# Altium PCB LazeRX-Mini 1.5.PcbDoc
Units mm, origin at the board's own origin, x right, y up, seen from the top; angles counter-clockwise.
Board outline 19.5 x 27 mm, 2 copper layers (Top Layer, Bottom Layer); 26 components, 38 nets, 111 pads, 48 vias.
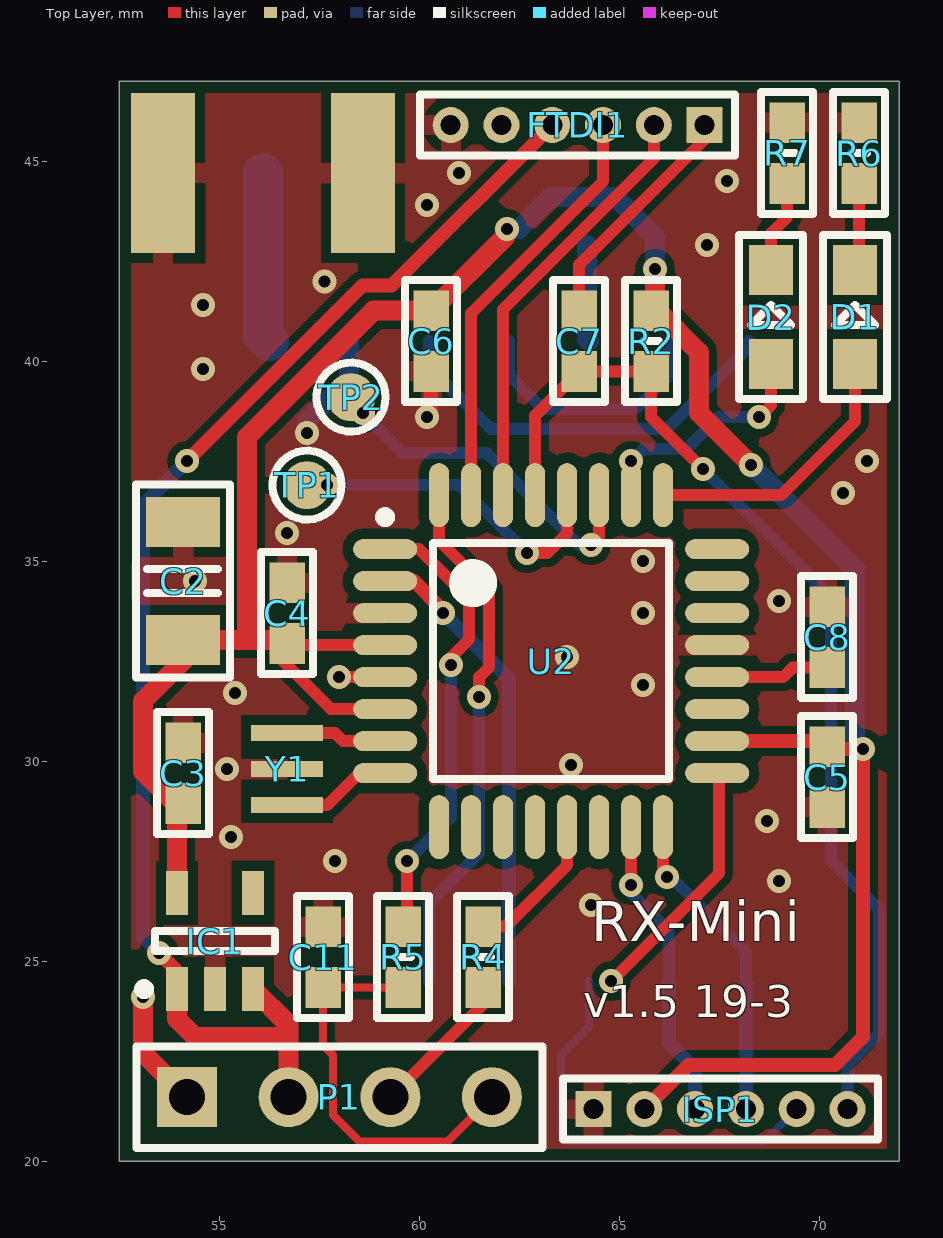
[diagram p0: Top Layer view]
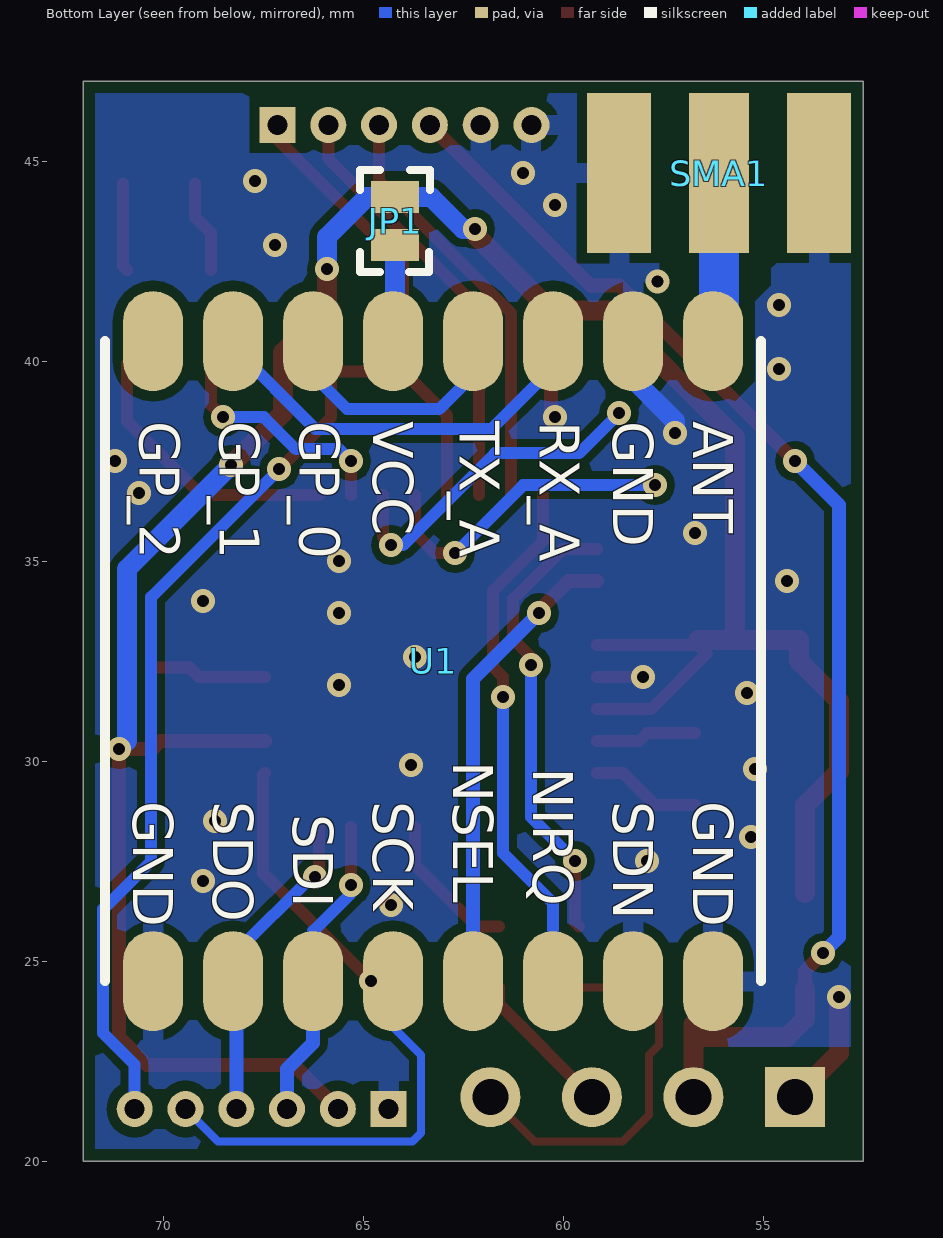
[diagram p1: Bottom Layer view, seen from below]

## Layer stack, top to bottom
Top Solder: solder mask 0.0102, Solder Resist, Dk 3.5
Top Layer: signal copper 0.0356
Dielectric 1: dielectric 0.32, FR-4, Dk 4.8
Bottom Layer: signal copper 0.0356
Bottom Solder: solder mask 0.0102, Solder Resist, Dk 3.5

## Board outline
52.5,20 72,20 72,47 52.5,47

## Design rules (kind name [scope] priority, off if disabled: settings)
BoardOutlineClearance BoardOutlineClearance_1 [OnLayer('Top Overlay')] p1: gap=0
BoardOutlineClearance [All] p2: gap=0.3
Clearance [All] p1: gap=0.2 except(0.26: Arc-SMDPad Arc-THPad Arc-Fill Track-SMDPad Track-THPad Track-Fill SMDPad-SMDPad SMDPad-THPad SMDPad-Via SMDPad-Fill SMDPad-Poly SMDPad-Region SMDPad-Text THPad-THPad THPad-Via THPad-Fill THPad-Poly THPad-Region THPad-Text Via-Fill Fill-Fill)
ComponentClearance [All] p1: gap=0.25 collisioncheckmode=3 verticalgap=0 showdistances=FALSE
HoleSize [All] p1: absolutevalues=TRUE maxlimit=6 minlimit=0.3 maxpercent=80.000 minpercent=20.000
HoleToHoleClearance [All] p1: gap=0.2 allowstackedmicrovias=TRUE
MinimumSolderMaskSliver [All] p1: minsoldermaskwidth=0
PolygonConnect PolygonConnect_1 [isVia vs InNet('Gnd')] p1: connectstyle=Direct reliefconductorwidth=0.254 reliefentries=4 polygonreliefangle="90 Angle" airgapwidth=0.254
PolygonConnect [All] p2: connectstyle=Relief reliefconductorwidth=0.5 reliefentries=4 polygonreliefangle="90 Angle" airgapwidth=0.254
RoomDefinition "LazeRX-Mini 1.5" [InComponentClass('LazeRX-Mini 1.5')] p1: confinementstyle=ConfineOut formatcopy=TRUE lockcomponents=FALSE outline 128.016,22.86 266.827,22.86 266.827,99.441 128.016,99.441
RoutingVias [All] p1: holewidth=0.3 width=0.6 viastyle="Through Hole" minholewidth=0.3 minwidth=0.6 maxholewidth=3 maxwidth=3
SilkToSilkClearance [All] p1: silktosilkclearance=0
SilkToSolderMaskClearance [IsPad] p1: minsilkscreentomaskgap=0 clearancetoexposedcopper=TRUE
SolderMaskExpansion [All] p1: expansion=0.102
Width [All] p1: maxlimit=3 minlimit=0.2 preferedwidth=0.35
24 further rules are at their usual default settings.

## Components (designator, comment, footprint, x,y, rotation, side; value= is the part's Value field where it differs from the comment)
C2 "10uF" "1206 CAP" 54.1,34.5 r90 top
C3 "104" "0603 CAP" 54.1,29.7 r270 top
C4 "104" "0603 CAP" 56.7,33.7 r270 top
C5 "104" "0603 CAP" 70.2,29.6 r90 top
C6 "104" "0603 CAP" 60.3,40.5 r90 top
C7 "104" "0603 CAP" 64,40.5 r270 top
C8 "104" "0603 CAP" 70.2,33.1 r270 top
C11 "1uF" "0603 CAP" 57.6,25.1 r270 top
D1 "Gre" "0805 LED" 70.9,41.1 r270 top
D2 "Red" "0805 LED" 68.8,41.1 r270 top
FTDI1 "AVR FTDI 1.27" 127ISP 64.6,45.9 r180 top
IC1 "5205" 5205 54.9,25.5 r90 top
ISP1 "AVR ISP 1.27" 127ISP 66.9,21.3 r0 top locked
JP1 "SJ" SJ 64.2,43.5 r270 bottom
P1 "Header 4" HDR1X4 54.2,21.6 r0 top
R2 "10k" "0603 RES" 65.8,40.5 r90 top
R4 "1k" "0603 RES" 61.6,25.1 r90 top
R5 "1k" "0603 RES" 59.6,25.1 r90 top
R6 "100" "0603 RES" 71,45.2 r270 top
R7 "100" "0603 RES" 69.2,45.2 r270 top
SMA1 "SMA Base" "ANT SMA" 56.1,44.7 r180 bottom
TP1 "Test Pad" "Test Pad 1.2MM" 57.2,36.9 r0 top
TP2 "Test Pad" "Test Pad 1.2MM" 58.3,39.1 r90 top
U1 "RFM22" RFM22SMD 63.25,32.5 r270 bottom locked
U2 "ATmega328" ATMEGA328FIX 63.3,32.5 r0 top locked
Y1 "Crystal3Foot" Crystal3Foot 56.7,29.8 r0 top

## Footprints (in the part's own frame and the unit in brackets; to place one, negate y for a bottom-side part, rotate by r counter-clockwise, add the part's x,y. Pads: shape width x height; smd on the part's side, far side on the other; paste and mask are expansions set on the pad)
127ISP [mm]
  rect 0.9x0.9 hole 0.5: 1(-2.54,0)
  round 0.9 hole 0.5: 2(-1.27,0) 3(0,0) 4(1.27,0) 5(2.54,0) 6(3.81,0)
  silkscreen extent -3.3,-0.76 4.57,0.76
"0603 CAP" [mil]
  rect 40x35 smd: 1(-29.92,0) 2(29.92,0)
  silkscreen extent -60,-26 60,26
"0603 RES" [mil]
  rect 40x35 smd: 1(-29.92,0) 2(29.92,0)
  silkscreen extent -60,-26 60,26
"0805 LED" [mil]
  rect 49x43 smd: 1(46.26,0) 2(-46.26,0)
  silkscreen extent -81,-31 81,31
"1206 CAP" [mm]
  rect 1.25x1.85 smd: 1(-1.475,0) 2(1.475,0)
  silkscreen extent -2.41,-1.18 2.41,1.17
5205 [mm] "SOT23, 5-Leads, Body 3.0x3.0mm (max), Pitch 0.95mm, IPC Medium Density"
  rect 1.1x0.55 smd: 1(-1.2,0.95) 2(-1.2,0) 3(-1.2,-0.95) 4(1.2,-0.95) 5(1.2,0.95)
  silkscreen extent -1.32,-1.5 0.25,1.9, body extent -0.87,-1.5 0.87,1.5, height 1.3
"ANT SMA" [mm]
  rect 1.5x4 smd: 1(0,0)
  rect 1.6x4 smd far side: 2(-2.5,0) 2(2.5,0)
  rect 1.6x4 smd: 2(-2.5,0) 2(2.5,0)
ATMEGA328FIX [mm] "QFP, 32-Leads, Body 9.0x9.0mm (max), Pitch 0.80mm, IPC Medium Density"
  oval 1.6x0.5 smd: 1(-4.15,2.8) 2(-4.15,2) 3(-4.15,1.2) 4(-4.15,0.4) 5(-4.15,-0.4) 6(-4.15,-1.2) 7(-4.15,-2) 8(-4.15,-2.8) 17(4.15,-2.8) 18(4.15,-2) 19(4.15,-1.2) 20(4.15,-0.4) 21(4.15,0.4) 22(4.15,1.2) 23(4.15,2) 24(4.15,2.8)
  oval 0.5x1.6 smd: 9(-2.8,-4.15) 10(-2,-4.15) 11(-1.2,-4.15) 12(-0.4,-4.15) 13(0.4,-4.15) 14(1.2,-4.15) 15(2,-4.15) 16(2.8,-4.15) 25(2.8,4.15) 26(2,4.15) 27(1.2,4.15) 28(0.4,4.15) 29(-0.4,4.15) 30(-1.2,4.15) 31(-2,4.15) 32(-2.8,4.15)
  silkscreen extent -4.27,-2.95 2.95,3.72, body extent -3.5,-3.5 3.5,3.5, height 2
Crystal3Foot [mm]
  rect 1.8x0.4 smd: 1(0,0.9) 2(0,0) 3(0,-0.9)
  body extent -0.8,-1.5 0.8,1.5, height 0.5
HDR1X4 [mm] "Connector; Header; 4 Position"
  rect 1.5x1.5 hole 0.9: 1(0,0)
  round 1.5 hole 0.9: 2(2.54,0) 3(5.08,0) 4(7.62,0)
  silkscreen extent -1.27,-1.27 8.89,1.27
RFM22SMD [mm]
  oval 2.5x1.5 smd: 1(-8,7) 2(-8,5) 3(-8,3) 4(-8,1) 5(-8,-1) 6(-8,-3) 7(-8,-5) 8(-8,-7) 9(8,-7) 10(8,-5) 11(8,-3) 12(8,-1) 13(8,1) 14(8,3) 15(8,5) 16(8,7)
  silkscreen extent -8,-8.2 8,8.2
SJ [mm]
  rect 0.8x1.2 smd: 1(-0.6,0) 2(0.6,0)
  Top Layer pour cut-out: -1,0.6 1,0.6 1,-0.6 -1,-0.6
  silkscreen extent -1.27,-0.87 1.27,0.87
"Test Pad 1.2MM" [mm]
  round 1.2 smd: 1(0,0)
  silkscreen extent -0.86,-0.86 0.86,0.86

## Part data
C2: library part "Cap Pol", "Capacitor"
C3 C4 C5 C6 C7 C8 C11: library part CAP, "Capacitor"
D1 D2: library part LED, "Typical RED, GREEN, YELLOW, AMBER GaAs LED"
P1: "Header, 4-Pin"
R2 R4 R5 R6 R7: library part Res, "Resistor"

## Via types
v1: diameter 0.6, hole 0.3, Top Layer to Bottom Layer, tented both sides, 48 vias

## Nets (pads, with @x,y where several pads share a name; then routed paths per layer and width w, separated by ;. In a path a pad name is that pad's centre, name@x,y a point inside that pad or via, vN(x,y) a via of type N, cw(c..) or ccw(c..) an arc to the next point about the centre after c; other vN are vias at no path point)
A0: U2.23
A1: U2.24
A2: D1.1 U2.25 | length 7
  Top Layer w0.3: U2.25 69.05,36.65 70.9,38.5 D1.1
A3: D2.1 U2.26 | length 6
  Top Layer w0.3: U2.26 v1(65.3,37.5) ; v1(68.5,38.6) 68.8,38.9 D2.1
  Bottom Layer w0.3: v1(65.3,37.5) 65.6,37.8 66.681,37.8 67.481,38.6 v1(68.5,38.6)
A4: TP2.1 U2.27 | length 8.4
  Top Layer w0.3: v1(64.3,35.4) 64.5,35.6 U2.27
  Bottom Layer w0.3: v1(58.6,38.7) 59.6,37.7 61.7,37.7 64,35.4 v1(64.3,35.4)
A5: TP1.1 U2.28 | length 7.9
  Top Layer w0.3: v1(62.7,35.2) 63.2,35.2 63.7,35.7 U2.28
  Bottom Layer w0.3: v1(57.7,36.9) 61,36.9 v1(62.7,35.2)
A6: U2.19
A7: U2.22
AREF: C8.2 U2.20 | length 2.8
  Top Layer w0.3: U2.20 69.1,32.1 69.34,32.34 C8.2
D2: U1.14 U2.32 | length 13.3
  Top Layer w0.3: U2.32 60.5,35.507 61.75,34.257 61.75,32.35 61.5,32.1 v1(61.5,31.6)
  Bottom Layer w0.3: U1.14 60.25,26.45 61.5,27.7 v1(61.5,31.6)
D3: R5.2 U2.1 | length 11.5
  Top Layer w0.3: U2.1 60,35.3 61.25,34.05 61.25,33.05 60.8,32.6 v1(60.8,32.4) ; R5.2 59.7,25.96 v1(59.7,27.5)
  Bottom Layer w0.3: v1(59.7,27.5) 60.8,28.6 v1(60.8,32.4)
D4: U1.13 U2.2 | length 11.7
  Top Layer w0.35: U2.2 59.869,34.5 60.6,33.769 v1(60.6,33.7)
  Bottom Layer w0.35: v1(60.6,33.7) 62.25,32.05 U1.13
D5: U2.9
D6: U2.10
D7: U2.11
D8: U2.12
D9: R4.2 U2.13 | length 3.7
  Top Layer w0.3: R4.2 62.16,25.86 63.7,27.4 U2.13
D10: U2.14
D11: ISP1.3 U1.11 U2.15 | length 7.7
  Top Layer w0.3: v1(65.3,26.9) U2.15
  Bottom Layer w0.3: v1(65.3,26.9) 65.3,26.7 66.25,25.75 U1.11
  Bottom Layer w0.35: U1.11 66.25,22.95 66.9,22.3 ISP1.3
D12: ISP1.4 U1.10 U2.16 | length 7.9
  Top Layer w0.3: v1@66.1,27.1 U2.16
  Bottom Layer w0.3: v1(66.2,27.1) 66.3,27.1 68.17,25.23 U1.10@68.17,24.42
  Bottom Layer w0.35: ISP1.4 U1.10@68.17,24.42
D13: ISP1.5 U1.12 U2.17 | length 16.7
  Top Layer w0.3: v1(64.8,24.5) 67.5,27.2 67.5,29.65 U2.17
  Bottom Layer w0.2: U1.12 64.25,23.35 63.55,22.65 63.55,20.701 63.761,20.49 68.63,20.49 ISP1.5
DTR: C7.1 FTDI1.1 | length 5.9
  Top Layer w0.3: C7.1 64,42.41 67.14,45.55 FTDI1.1
GND: C2.2 C3.1 C4.1 C5.1 C6.1 C8.1 C11.1 FTDI1.5 FTDI1.6 IC1.2 ISP1.1 P1.1 R6.1 R7.1 SMA1.2 U1.2 U1.9 U1.15 U1.16 U2.3 U2.5 U2.21 Y1.2 | length 8
  Top Layer w0.3: v1(58,32.1) U2.5
  Top Layer w0.35: v1(60.198,38.608) 60.3,38.71 C6.1
  Top Layer w0.5: v1(53.1,24.1) 53.1,22.7 P1.1
  Bottom Layer w0.5: v1(57.2,38.2) 57.2,38.5 58.25,39.55 U1.2
  other v1: 64.3,26.4 69,27 57.9,27.5 55.3,28.1 68.7,28.5 55.2,29.8 63.8,29.9 55.4,31.7 65.6,31.9 63.7,32.6 65.6,33.7 69,34 54.4,34.5 65.6,35 56.7,35.7 70.6,36.7 71.2,37.5 54.6,39.8 54.6,41.4 57.635,41.984 67.2,42.9 60.2,43.9 67.7,44.5 61,44.7
NetD1_2: D1.2 R6.2 | length 2.2
  Top Layer w0.3: D1.2 71,42.375 R6.2
NetD2_2: D2.2 R7.2 | length 2.3
  Top Layer w0.3: D2.2 68.8,43.2 69.2,43.6 R7.2
NetSMA1_1: SMA1.1 U1.1 | length 4.3
  Bottom Layer w1: SMA1.1 56.1,40.65 U1.1
NetU1_3: U1.3 U1.7 | length 10.3
  Bottom Layer w0.3: U1.3 60.25,39.85 61.8,38.3 66.19,38.3 68.25,40.36 U1.7
NetU1_4: U1.4 U1.6 | length 6.4
  Bottom Layer w0.3: U1.4 62.25,39.65 63.1,38.8 65.4,38.8 66.25,39.65 U1.6
NetU2_7: U2.7 Y1.1 | length 2.5
  Top Layer w0.3: Y1.1 57.9,30.7 58.1,30.5 U2.7
NetU2_8: U2.8 Y1.3 | length 2.8
  Top Layer w0.3: Y1.3 57.7,28.9 58.5,29.7 U2.8
PPM: P1.3 R4.1 | length 3.7
  Top Layer w0.3: P1.3 61.6,23.92 R4.1
RAW: FTDI1.4 IC1.1 IC1.3 P1.2 | length 33.4
  Top Layer w0.35: v1(53.5,25.2) 53.95,24.75 IC1.1 ; v1(54.2,37.5) 58.585,41.885 59.315,41.885 FTDI1.4
  Top Layer w0.5: IC1.1 53.95,23.55 54.4,23.1 56.74,23.1 ; IC1.3 56.74,23.41 56.74,23.1 ; P1.2 56.74,23.1
  Bottom Layer w0.35: v1(53.5,25.2) 53.1,25.6 53.1,36.4 v1(54.2,37.5)
RESET: C7.2 ISP1.6 R2.1 U2.29 | length 26.5
  Top Layer w0.3: U2.29 62.9,38.64 C7.2 R2.1 65.8,38.6 v1(67.1,37.3)
  Bottom Layer w0.3: v1(67.1,37.3) 70.3,34.1 70.3,27.5 71.5,26.3 71.5,23.2 70.71,22.41 ISP1.6
RSSI: C11.2 P1.4 R5.1 | length 10
  Top Layer w0.2: R5.1 C11.2 57.6,22.9 57.85,22.65 57.85,21.15 58.51,20.49 60.71,20.49 P1.4
RXI: FTDI1.2 U2.30 | length 10.8
  Top Layer w0.3: U2.30 62.1,41.293 65.87,45.063 FTDI1.2
TXO: FTDI1.3 U2.31 | length 10.6
  Top Layer w0.3: U2.31 61.3,41.2 64.6,44.5 FTDI1.3
VCC: C2.1 C3.2 C4.2 C5.2 C6.2 IC1.5 ISP1.2 JP1.1 R2.2 U2.4 U2.6 U2.18 | length 66.2
  Top Layer w0.3: C4.2@56.615,32.885 C4.2@56.615,33.025 ; U2.6 57.8,31.3 56.415,32.685 56.63,32.9 U2.4
  Top Layer w0.35: ISP1.2 66.73,22.4 70.4,22.4 71.1,23.1 v1(71.1,30.3) 70.26,30.3 C5.2 70.06,30.5 U2.18
  Top Layer w0.5: IC1.5 53.95,28.89 53.1,29.74 53.1,31.5 54.1,32.5 C2.1 55.7,33.025 ; C4.2@56.615,33.025 55.7,33.025 ; v1@62.164,43.124 C6.2 58.86,41.26 55.7,38.1 55.7,33.025 ; v1(65.9,42.3) 65.9,41.36 R2.2 65.954,41.26 67,40.214 67,38.7 v1(68.3,37.4)
  Bottom Layer w0.5: v1(62.2,43.3) 62.5,43.3 63.3,44.1 JP1.1 64.9,44.1 65.9,43.1 v1(65.9,42.3) ; v1(68.3,37.4) 70.9,34.8 70.9,30.5 v1(71.1,30.3)
VCC_RF: JP1.2 U1.5 | length 2.4
  Bottom Layer w0.5: JP1.2 64.2,40.55 U1.5
pads on no net: IC1.4 U1.8

## Polygon pours and split planes (outlines as drawn)
GND on Top Layer "GND_L01_P000" (solid, pour order 0): 50,20 50,47 72,47 72,20
GND on Bottom Layer "GND_L02_P001" (solid, pour order 1): 50,20 50,47 72,47 72,20

## Other copper
Top Layer:
  pour cut-out: 52.07,22.86 62.992,22.86 62.992,19.558 52.07,19.558
Bottom Layer:
  pour cut-out: 54.8,47.5 57.6,47.5 57.6,41.9 57.2,41.5 57.1,39.7 56.7,39.3 55.7,39 55.2,39.5 55.2,41.5 54.8,41.9
  pour cut-out: 52.07,22.86 62.992,22.86 62.992,19.558 52.07,19.558

## Silkscreen, mask and mechanical layers (free items; w line width, h text height)
Top Overlay:
  text "RX-Mini" at 64.3,25.5 h1
  text "v1.5 19-3" at 64.1,23.6 h0.8
Mechanical 1:
  the board outline again, w0.2

## Text inside footprints (layer, text, board x,y; h text height)
U1: Bottom Overlay "SDO" at 68.75,29 h1 r90; Bottom Overlay "SDI" at 66.75,28.667 h1 r90; Bottom Overlay "SCK" at 64.75,29 h1 r90; Bottom Overlay "NSEL" at 62.75,30 h1 r90; Bottom Overlay "NIRQ" at 60.75,29.833 h1 r90; Bottom Overlay "SDN" at 58.75,29 h1 r90; Bottom Overlay "GND" at 70.75,29 h1 r90; Bottom Overlay "GND" at 56.75,29 h1 r90; Bottom Overlay "GP_2" at 70.583,38.5 h1 r90; Bottom Overlay "GP_1" at 68.583,38.5 h1 r90; Bottom Overlay "GP_0" at 66.583,38.5 h1 r90; Bottom Overlay "VCC" at 64.75,38.5 h1 r90; Bottom Overlay "TX_A" at 62.583,38.5 h1 r90; Bottom Overlay "RX_A" at 60.583,38.5 h1 r90; Bottom Overlay "GND" at 58.75,38.5 h1 r90; Bottom Overlay "ANT" at 56.75,38.5 h1 r90